# Altium PCB Node1.PcbDoc
Units mil, origin at the board's own origin, x right, y up, seen from the top; angles counter-clockwise.
Board outline 4850 x 3500 mil, 2 copper layers (Top Layer, Bottom Layer); 46 components, 70 nets, 310 pads, 88 vias.
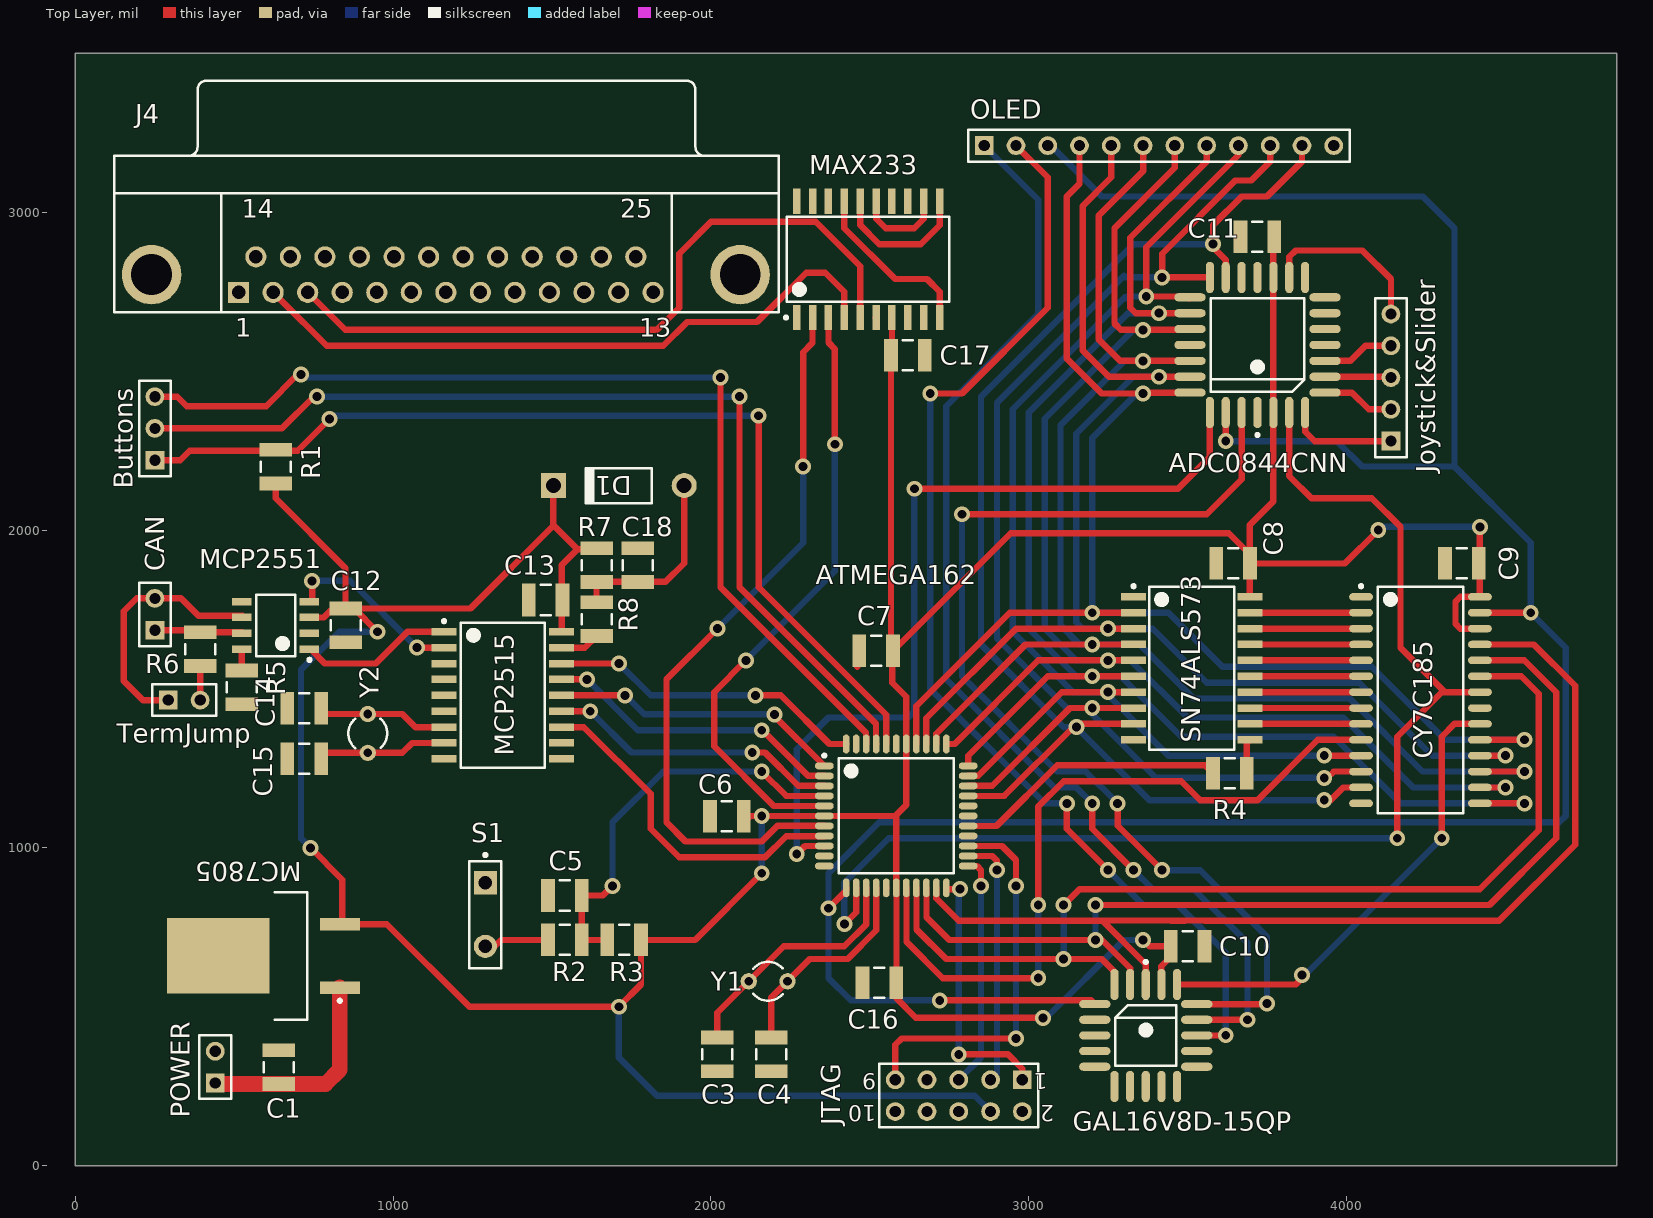
[diagram p0: Top Layer view]
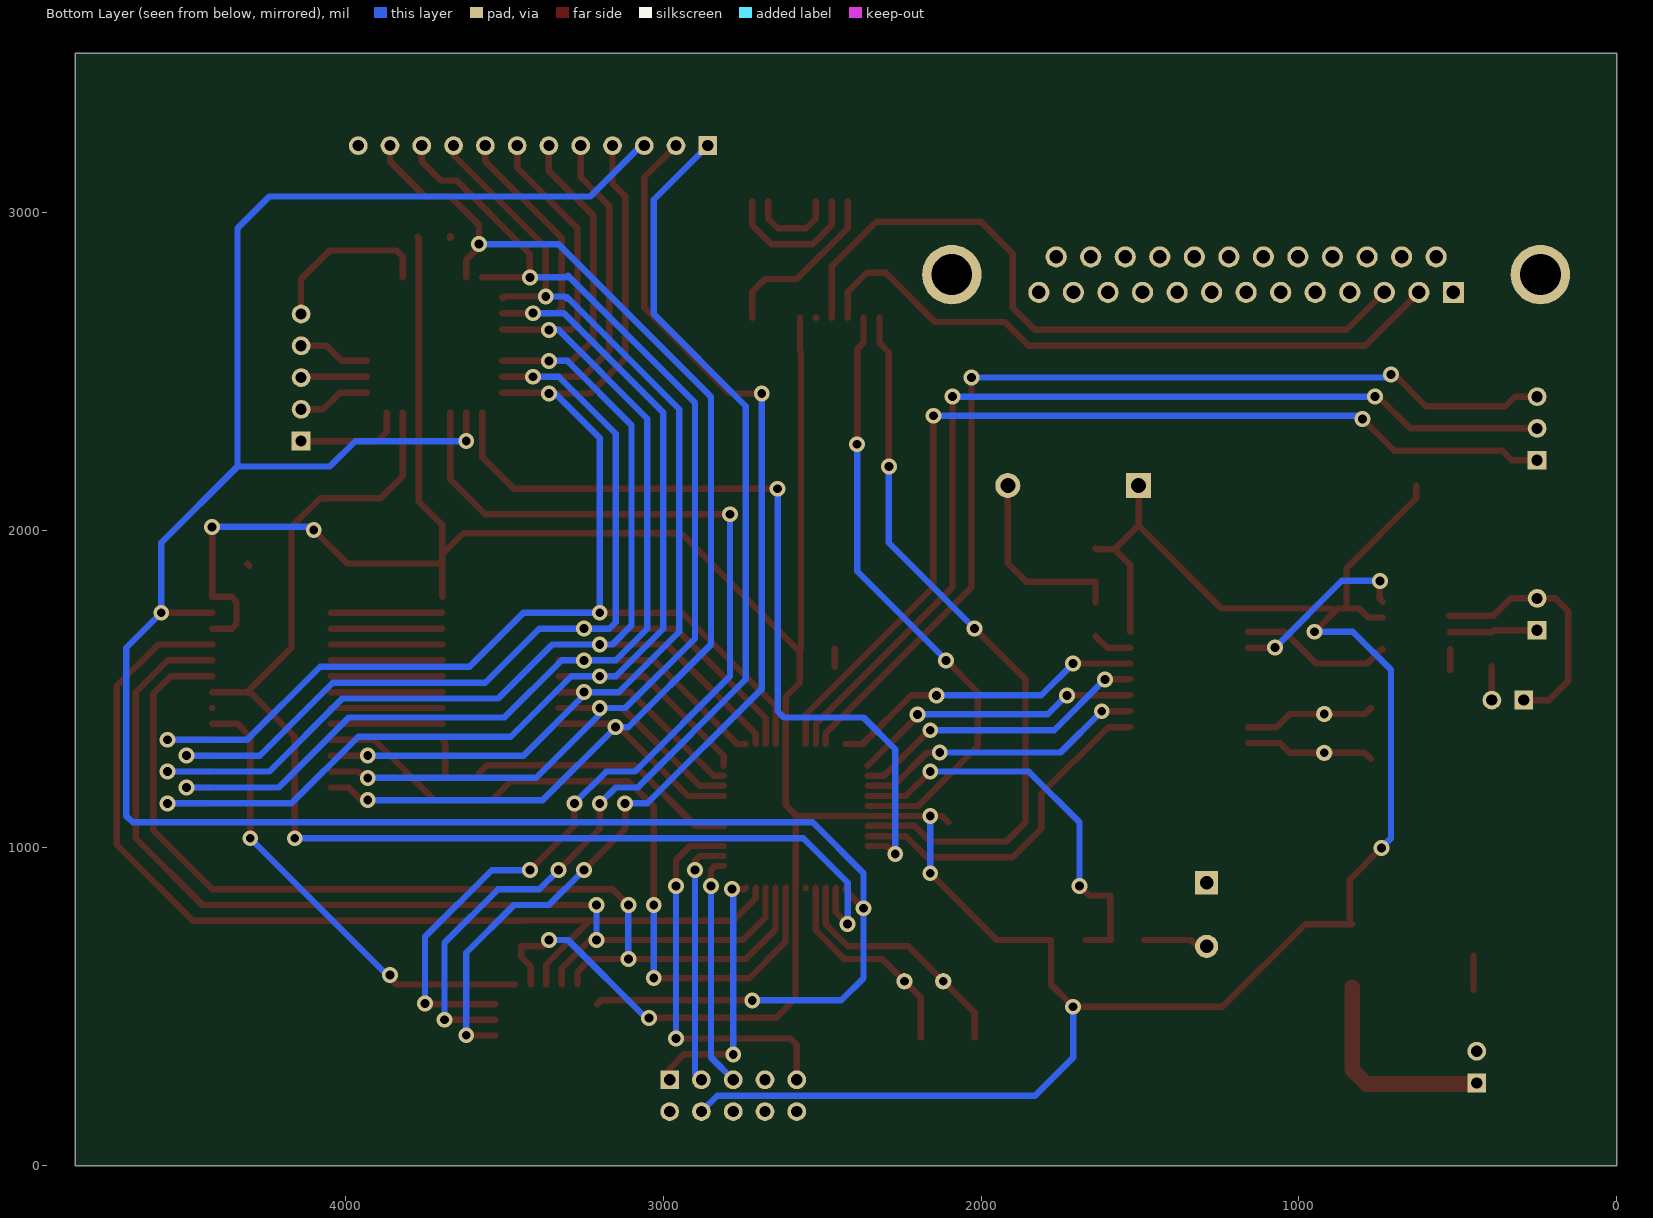
[diagram p1: Bottom Layer view, seen from below]

## Layer stack, top to bottom
Top Solder: solder mask 0.4, Solder Resist, Dk 3.5
Top Layer: signal copper 1.4
Dielectric 1: dielectric 12.6, FR-4, Dk 4.8
Bottom Layer: signal copper 1.4
Bottom Solder: solder mask 0.4, Solder Resist, Dk 3.5

## Board outline
0,0 2410,0 4850,0 4850,1750 4850,3500 4560,3500 3040,3500 0,3500

## Design rules (kind name [scope] priority, off if disabled: settings)
Clearance [All] p1: gap=10 except(8: SMDPad-SMDPad)
PolygonConnect [All] p1: connectstyle=Relief reliefconductorwidth=10 reliefentries=4 polygonreliefangle="90 Angle" airgapwidth=10
RoomDefinition U_ADC [InComponentClass('U_ADC')] p1: confinementstyle=ConfineIn formatcopy=TRUE lockcomponents=FALSE outline 3420,2165.2 4300,2165.2 4300,3020.2 3420,3020.2
RoomDefinition U_USART [InComponentClass('U_USART')] p2: confinementstyle=ConfineIn formatcopy=TRUE lockcomponents=FALSE outline 100,2550 2450,2550 2450,2450 2800,2450 2800,3100 2220,3100 2220,3450 100,3450
RoomDefinition U_SRAM [InComponentClass('U_SRAM')] p3: confinementstyle=ConfineIn formatcopy=TRUE lockcomponents=FALSE outline 3240,1050 4540,1050 4540,2050 3240,2050
RoomDefinition U_OLED [InComponentClass('U_OLED')] p4: confinementstyle=ConfineIn formatcopy=TRUE lockcomponents=FALSE outline 2790,3285 2790,3135 4040,3135 4040,3285
RoomDefinition U_GAL [InComponentClass('U_GAL')] p5: confinementstyle=ConfineIn formatcopy=TRUE lockcomponents=FALSE outline 3118.86,101.14 3918.86,101.14 3918.86,851.14 3118.86,851.14
RoomDefinition U_CAN [InComponentClass('U_CAN')] p6: confinementstyle=ConfineIn formatcopy=TRUE lockcomponents=FALSE outline 100,2050 1400,2050 1400,2200 1970,2200 1970,1630 1650,1630 1650,1150 100,1150
RoomDefinition MCU&VoltageRegulator [InComponentClass('MCU&VoltageRegulator')] p7: confinementstyle=ConfineIn formatcopy=TRUE lockcomponents=FALSE outline 100,2500 100,2100 1350,2100 1350,2250 2000,2250 2000,1600 1700,1600 1700,1100 100,1100 100,100 3070,100 3070,1690 3060,1700 2400,1700 2400,2500
RoutingVias [All] p1: holewidth=28 width=50 viastyle="Through Hole" minholewidth=28 minwidth=50 maxholewidth=28 maxwidth=50
SolderMaskExpansion [All] p1: expansion=4
Width [All] p1: maxlimit=50 minlimit=10 preferedwidth=10
30 further rules are at their usual default settings.

## Classes and differential pairs
component class MCU&VoltageRegulator: ATMEGA162 Buttons C1 C3 C4 C5 C6 C7 C16 MC7805 POWER R1 R2 R3 S1 Y1
component class U_ADC: ADC0844CNN C11 Joystick&Slider
component class U_CAN: C12 C13 C14 C15 C18 CAN D1 MCP2515 MCP2551 R5 R6 R7 R8 TermJump Y2
component class U_GAL: C10 GAL16V8D-15QP
component class U_OLED: OLED
component class U_SRAM: C8 C9 CY7C185 R4 SN74ALS573
component class U_USART: C17 J4 MAX233
net class A[8..11]: A8 A9 A10 A11
net class AD[0..7]: AD0 AD1 AD2 AD3 AD4 AD5 AD6 AD7

## Components (designator, comment, footprint, x,y, rotation, side; value= is the part's Value field where it differs from the comment)
ADC0844CNN "ADC0844CNN" "ADC0844CNN PLCC 28-PIN" 3720,2582.6 r180 top
ATMEGA162 "ATMEGA162" "ATmega162 TQFP 44-pin" 3035.91,647.6 r0 top
Buttons "Button header" HDR1X3 250,2220 r90 top
C1 "Cap" C1210 640,310 r270 top
C3 "Cap" C1210 2020,350 r270 top
C4 "Cap" C1210 2190,350 r90 top
C5 "Cap" C1210 1540,850 r0 top
C6 "Cap" C1210 2050,1100 r180 top
C7 "Cap" C1210 2520,1620 r180 top
C8 "Cap" C1210 3643.07,1895 r180 top
C9 "Cap" C1210 4363.07,1895 r180 top
C10 "Cap" C1210 3500,690 r180 top
C11 "Cap" C1210 3720,2922.6 r180 top
C12 "Cap" C1210 850,1700 r270 top
C13 "Cap" C1210 1480,1780 r0 top
C14 "Cap" C1210 720,1440 r180 top
C15 "Cap" C1210 720,1280 r180 top
C16 "Cap" C1210 2530,575 r180 top
C17 "Cap" C1210 2620,2550 r0 top
C18 "Cap" C1210 1770,1890 r90 top
CAN "CAN Header" HDR1X2 250,1685 r90 top
CY7C185 "SRAM" "CY7C185 SOIC 28-PIN" 4232.99,1465 r0 top
D1 "Diode 1N4002" DO-41 1710,2140 r180 top
GAL16V8D-15QP "GAL16V8D-15QP" "GAL 16V8D-10LJ/-10QL PLCC 20-PIN" 3368.43,409.57 r0 top
J4 "D Connector 25" DSUB1.385-2H25A 1165.65,3178.11 r0 top
Joystick&Slider "Input1 header" HDR1X5 4140,2280 r90 top
JTAG "JTAG" HDR2X5 2980,270 r180 top
MAX233 "USART transceiver" "MAX233 SOIC 20-PIN" 2494.74,2851.81 r90 top
MC7805 "Voltage regulator" "MC7805 DPAK 3-PIN" 591.73,660 r180 top
MCP2515 "CAN controller" "MCP2515 SOIC 18-PIN" 1344.96,1480 r0 top
MCP2551 "CAN transceiver" "MACP2551 SOIC 8-PIN" 630,1700 r180 top
OLED "OLED Header" HDR1X12 2860,3210 r0 top
POWER "Power header" HDR1X2 440,260 r90 top
R1 "Res" 14-1210 630,2200 r90 top
R2 "Res" 14-1210 1540,710 r0 top
R3 "Res" 14-1210 1726.85,710 r0 top
R4 "Res1" 14-1210 3633.07,1235 r180 top
R5 "Res" 14-1210 523.7,1505 r90 top
R6 "Res" 14-1210 392.32,1625 r90 top
R7 "Res" 14-1210 1640,1890 r270 top
R8 "Res" 14-1210 1640,1720 r270 top
S1 "SW-PB" SPST-2 1290,790 r270 top
SN74ALS573 "D-latch" "D-Latch SOIC 20-PIN" 3513.07,1565 r0 top
TermJump "Jumper header" HDR1X2 292.32,1465 r0 top
Y1 "XTAL" R38 2180,580 r270 top
Y2 "XTAL" R38 920,1360 r180 top

## Footprints (in the part's own frame and the unit in brackets; to place one, negate y for a bottom-side part, rotate by r counter-clockwise, add the part's x,y. Pads: shape width x height; smd on the part's side, far side on the other; paste and mask are expansions set on the pad)
14-1210 [mm] "Chip Resistor, Body 3.2x2.5mm, IPC High Density"
  rect 1.1x2.6 smd: 1(-1.35,0) 2(1.35,0)
  silkscreen extent -0.4,-1.2 0.4,1.2, body extent -1.68,-1.32 1.68,1.32, height 0.9
"ADC0844CNN PLCC 28-PIN" [mm] "Leaded Chip Carrier, 28-Leads, Body 12,45x12,45mm, Pitch 1,270mm, IPC Medium Density"
  oval 0.65x2.5 smd: 1(0,5.4) 2(-1.27,5.4) 3(-2.54,5.4) 4(-3.81,5.4) 12(-3.81,-5.4) 13(-2.54,-5.4) 14(-1.27,-5.4) 15(0,-5.4) 16(1.27,-5.4) 17(2.54,-5.4) 18(3.81,-5.4) 26(3.81,5.4) 27(2.54,5.4) 28(1.27,5.4)
  oval 2.5x0.65 smd: 5(-5.4,3.81) 6(-5.4,2.54) 7(-5.4,1.27) 8(-5.4,0) 9(-5.4,-1.27) 10(-5.4,-2.54) 11(-5.4,-3.81) 19(5.4,-3.81) 20(5.4,-2.54) 21(5.4,-1.27) 22(5.4,0) 23(5.4,1.27) 24(5.4,2.54) 25(5.4,3.81)
  silkscreen extent -3.75,-3.75 3.75,7.32, body extent -5.79,-5.79 5.79,5.79, height 4.57
"ATmega162 TQFP 44-pin" [mm] "TQFP, 44-Leads, Body 10,00x10,00mm, Pitch 0,80mm, IPC Medium Density"
  oval 1.5x0.55 smd: 1(-17.25,15.5) 2(-17.25,14.7) 3(-17.25,13.9) 4(-17.25,13.1) 5(-17.25,12.3) 6(-17.25,11.5) 7(-17.25,10.7) 8(-17.25,9.9) 9(-17.25,9.1) 10(-17.25,8.3) 11(-17.25,7.5) 23(-5.75,7.5) 24(-5.75,8.3) 25(-5.75,9.1) 26(-5.75,9.9) 27(-5.75,10.7) 28(-5.75,11.5) 29(-5.75,12.3) 30(-5.75,13.1) 31(-5.75,13.9) 32(-5.75,14.7) 33(-5.75,15.5)
  oval 0.55x1.5 smd: 12(-15.5,5.75) 13(-14.7,5.75) 14(-13.9,5.75) 15(-13.1,5.75) 16(-12.3,5.75) 17(-11.5,5.75) 18(-10.7,5.75) 19(-9.9,5.75) 20(-9.1,5.75) 21(-8.3,5.75) 22(-7.5,5.75) 34(-7.5,17.25) 35(-8.3,17.25) 36(-9.1,17.25) 37(-9.9,17.25) 38(-10.7,17.25) 39(-11.5,17.25) 40(-12.3,17.25) 41(-13.1,17.25) 42(-13.9,17.25) 43(-14.7,17.25) 44(-15.5,17.25)
  silkscreen extent -17.37,6.9 -6.9,16.45, body extent -16.5,6.5 -6.5,16.5, height 1.2
C1210 [mm] "Chip Capacitor, Body 3.2x2.5mm, IPC High Density"
  rect 1.1x2.6 smd: 1(-1.35,0) 2(1.35,0)
  silkscreen extent -0.4,-1.2 0.4,1.2, body extent -1.7,-1.35 1.7,1.35, height 1.3
"CY7C185 SOIC 28-PIN" [mm] "SOIC, 28-Leads, Body 17,90x7,50mm, Pitch 1,27mm, IPC Medium Density"
  oval 1.9x0.6 smd: 1(-4.75,8.255) 2(-4.75,6.985) 3(-4.75,5.715) 4(-4.75,4.445) 5(-4.75,3.175) 6(-4.75,1.905) 7(-4.75,0.635) 8(-4.75,-0.635) 9(-4.75,-1.905) 10(-4.75,-3.175) 11(-4.75,-4.445) 12(-4.75,-5.715) 13(-4.75,-6.985) 14(-4.75,-8.255) 15(4.75,-8.255) 16(4.75,-6.985) 17(4.75,-5.715) 18(4.75,-4.445) 19(4.75,-3.175) 20(4.75,-1.905) 21(4.75,-0.635) 22(4.75,0.635) 23(4.75,1.905) 24(4.75,3.175) 25(4.75,4.445) 26(4.75,5.715) 27(4.75,6.985) 28(4.75,8.255)
  silkscreen extent -4.87,-9.05 3.4,9.23, body extent -3.8,-9.05 3.8,9.05, height 2.67
"D-Latch SOIC 20-PIN" [mm] "SOIC, 20-Leads, Body 12,80x7,50mm, Pitch 1,27mm, IPC Medium Density"
  rect 2x0.6 smd: 1(-4.65,5.715) 2(-4.65,4.445) 3(-4.65,3.175) 4(-4.65,1.905) 5(-4.65,0.635) 6(-4.65,-0.635) 7(-4.65,-1.905) 8(-4.65,-3.175) 9(-4.65,-4.445) 10(-4.65,-5.715) 11(4.65,-5.715) 12(4.65,-4.445) 13(4.65,-3.175) 14(4.65,-1.905) 15(4.65,-0.635) 16(4.65,0.635) 17(4.65,1.905) 18(4.65,3.175) 19(4.65,4.445) 20(4.65,5.715)
  silkscreen extent -4.77,-6.5 3.4,6.69, body extent -3.8,-6.5 3.8,6.5, height 2.65
DO-41 [mm] "Diode, Axial; Body 5.2 x 2.7 mm (LxDia. max), Lead Dia. 0.86 mm (max)"
  round 2 hole 1.2: 1(-5.23,0)
  rect 2x2 hole 1.2: 2(5.23,0)
  silkscreen extent -2.65,-1.4 2.75,1.4
DSUB1.385-2H25A [mm] "Connector; D Subminiature; 25 Position; Right Angle; Pitch 1.385 mm"
  rect 1.69x1.69 hole 1.09: 1(-16.566,-10.92)
  round 1.69 hole 1.09: 2(-13.805,-10.92) 3(-11.044,-10.92) 4(-8.283,-10.92) 5(-5.522,-10.92) 6(-2.761,-10.92) 7(0,-10.92) 8(2.761,-10.92) 9(5.522,-10.92) 10(8.283,-10.92) 11(11.044,-10.92) 12(13.805,-10.92) 13(16.566,-10.92) 14(-15.185,-8.08) 15(-12.424,-8.08) 16(-9.663,-8.08) 17(-6.902,-8.08) 18(-4.141,-8.08) 19(-1.38,-8.08) 20(1.381,-8.08) 21(4.142,-8.08) 22(6.903,-8.08) 23(9.664,-8.08) 24(12.425,-8.08) 25(15.186,-8.08)
  round 4.76 hole 3.26: 26(-23.526,-9.5) 27(23.526,-9.5)
  silkscreen extent -26.5,-12.5 26.6,6
"GAL 16V8D-10LJ/-10QL PLCC 20-PIN" [mm] "Leaded Chip Carrier, 20-Leads, Body 9,79x9,79mm, Pitch 1,250mm, IPC Medium Density"
  oval 0.65x2.5 smd: 1(0,4.075) 2(-1.25,4.075) 3(-2.5,4.075) 9(-2.5,-4.075) 10(-1.25,-4.075) 11(0,-4.075) 12(1.25,-4.075) 13(2.5,-4.075) 19(2.5,4.075) 20(1.25,4.075)
  oval 2.5x0.65 smd: 4(-4.075,2.5) 5(-4.075,1.25) 6(-4.075,0) 7(-4.075,-1.25) 8(-4.075,-2.5) 14(4.075,-2.5) 15(4.075,-1.25) 16(4.075,0) 17(4.075,1.25) 18(4.075,2.5)
  silkscreen extent -2.43,-2.42 2.42,6, body extent -4.47,-4.47 4.47,4.47, height 4.52
HDR1X2 [mm] "Connector; Header; 2 Position"
  rect 1.5x1.5 hole 0.9: 1(0,0)
  round 1.5 hole 0.9: 2(2.54,0)
  silkscreen extent -1.27,-1.27 3.81,1.27
HDR1X3 [mm] "Connector; Header; 3 Position"
  rect 1.5x1.5 hole 0.9: 1(0,0)
  round 1.5 hole 0.9: 2(2.54,0) 3(5.08,0)
  silkscreen extent -1.27,-1.27 6.35,1.27
HDR1X5 [mm] "Connector; Header; 5 Position"
  rect 1.5x1.5 hole 0.9: 1(0,0)
  round 1.5 hole 0.9: 2(2.54,0) 3(5.08,0) 4(7.62,0) 5(10.16,0)
  silkscreen extent -1.27,-1.27 11.43,1.27
HDR1X12 [mm] "Connector; Header; 12 Position"
  rect 1.5x1.5 hole 0.9: 1(0,0)
  round 1.5 hole 0.9: 2(2.54,0) 3(5.08,0) 4(7.62,0) 5(10.16,0) 6(12.7,0) 7(15.24,0) 8(17.78,0) 9(20.32,0) 10(22.86,0) 11(25.4,0) 12(27.94,0)
  silkscreen extent -1.27,-1.27 29.21,1.27
HDR2X5 [mm] "Connector; Header; 5x2 Position"
  rect 1.5x1.5 hole 0.9: 1(0,0)
  round 1.5 hole 0.9: 2(0,2.54) 3(2.54,0) 4(2.54,2.54) 5(5.08,0) 6(5.08,2.54) 7(7.62,0) 8(7.62,2.54) 9(10.16,0) 10(10.16,2.54)
  silkscreen extent -1.27,-1.27 11.43,3.81
"MACP2551 SOIC 8-PIN" [mm] "SOIC, 8-Leads, Body 4,90x3,90mm, Pitch 1,27mm, IPC Medium Density"
  rect 1.55x0.6 smd: 1(-2.7,1.905) 2(-2.7,0.635) 3(-2.7,-0.635) 4(-2.7,-1.905) 5(2.7,-1.905) 6(2.7,-0.635) 7(2.7,0.635) 8(2.7,1.905)
  silkscreen extent -2.83,-2.45 1.55,2.88, body extent -1.95,-2.45 1.95,2.45, height 1.75
"MAX233 SOIC 20-PIN" [mm] "SOIC, 20-Leads, Body 12,80x7,50mm, Pitch 1,27mm, IPC Medium Density"
  rect 2x0.6 smd: 1(-4.65,5.715) 2(-4.65,4.445) 3(-4.65,3.175) 4(-4.65,1.905) 5(-4.65,0.635) 6(-4.65,-0.635) 7(-4.65,-1.905) 8(-4.65,-3.175) 9(-4.65,-4.445) 10(-4.65,-5.715) 11(4.65,-5.715) 12(4.65,-4.445) 13(4.65,-3.175) 14(4.65,-1.905) 15(4.65,-0.635) 16(4.65,0.635) 17(4.65,1.905) 18(4.65,3.175) 19(4.65,4.445) 20(4.65,5.715)
  silkscreen extent -4.77,-6.5 3.4,6.69, body extent -3.8,-6.5 3.8,6.5, height 2.65
"MC7805 DPAK 3-PIN" [mm] "D2-PAK, 3-Pads, Body 7,77x8,48mm (max), IPC Medium Density"
  rect 3.2x1 smd: 1(-6.1,2.54) 3(-6.1,-2.54)
  rect 8.2x6.05 smd: 2(3.6,0)
  silkscreen extent -6.23,-5.1 -0.9,5.1, body extent -3.5,-5.13 5.85,5.13, height 4.58
"MCP2515 SOIC 18-PIN" [mm] "SOIC, 18-Leads, Body 11,55x7,50mm, Pitch 1,27mm, IPC Medium Density"
  rect 2x0.6 smd: 1(-4.7,5.08) 2(-4.7,3.81) 3(-4.7,2.54) 4(-4.7,1.27) 5(-4.7,0) 6(-4.7,-1.27) 7(-4.7,-2.54) 8(-4.7,-3.81) 9(-4.7,-5.08) 10(4.7,-5.08) 11(4.7,-3.81) 12(4.7,-2.54) 13(4.7,-1.27) 14(4.7,0) 15(4.7,1.27) 16(4.7,2.54) 17(4.7,3.81) 18(4.7,5.08)
  silkscreen extent -4.82,-5.8 3.35,6.05, body extent -3.75,-5.8 3.75,5.8, height 2.65
R38 [mm] "Crystal, Thru-Hole; 2 Leads; Body 3.1 x 8.2 mm (Dia.xH)"
  round 1.3 hole 0.7: 1(0,1.55) 2(0,-1.55)
  silkscreen extent -1.55,-1.19 1.55,1.17
SPST-2 [mm] "Switch; 2 Leads"
  rect 1.85x1.85 hole 1.1: 1(-2.54,0)
  round 1.85 hole 1.1: 2(2.54,0)
  silkscreen extent -4.89,-1.27 4.28,1.27

## Part data
ADC0844CNN: "ADC - Analogue to Digital Converter"
ATMEGA162: "Atmega162 MicroControllerUnit"
Buttons: library part "Header 3", "Header, 3-Pin"
C1 C3 C4 C5 C6 C7 C8 C9 C10 C11 C12 C13 C14 C15 C16 C17 C18: library part "Cap Semi", "Capacitor (Semiconductor SIM Model)"
CAN POWER TermJump: library part "Header 2", "Header, 2-Pin"
CY7C185: library part CY7C185, "SRAM - Static Random Access Memory"
D1: "1 Amp General Purpose Rectifier"
GAL16V8D-15QP: "GAL - Generic Array Logic"
J4: "Receptacle Assembly, 25 Position, Right Angle"
Joystick&Slider: library part "Header 5", "Header, 5-Pin"
JTAG: library part "Header 5X2", "Header, 5-Pin, Dual row"
MAX233: library part MAX233, "Maxim RS232 transceiver"
MC7805: library part MC7805, "MC7805 Voltage Regulator"
MCP2515: library part MCP2515
MCP2551: library part MCP2551, "CAN Transceiver"
OLED: library part "Header 12", "Header, 12-Pin"
R1 R2 R3 R4 R5 R6 R7 R8: library part Res3, "Resistor"
S1: "Switch"
SN74ALS573: library part SN74ALS573, "D-Latch"
Y1 Y2: "Crystal Oscillator"

## Via types
v1: diameter 50, hole 28, Top Layer to Bottom Layer, 88 vias

## Nets (pads, with @x,y where several pads share a name; then routed paths per layer and width w, separated by ;. In a path a pad name is that pad's centre, name@x,y a point inside that pad or via, vN(x,y) a via of type N, cw(c..) or ccw(c..) an arc to the next point about the centre after c; other vN are vias at no path point)
A8: ATMEGA162.18 CY7C185.10 | length 2324.5
  Top Layer w20: ATMEGA162.18 2615.32,873.31 2615.32,704.68 2730,590 v1(3030,590) ; v1(3030,820) 3030,1130 3110,1210 3480,1210 3540,1150 3720,1150 3910,1340 CY7C185.10 CY7C185.10@4046.06,1340
  Bottom Layer w20: v1(3030,590) v1(3030,820)
A9: ATMEGA162.19 CY7C185.23 GAL16V8D-15QP.3 | length 3249.5
  Top Layer w20: ATMEGA162.19 2646.81,873.31 2646.81,743.19 2740,650 v1(3110,650) 3230,650 3270,610 GAL16V8D-15QP.3 ; v1(3110,820) 3160,870 4420,870 4605,1055 4605,1485 4550,1540 CY7C185.23@4420.08,1540
  Bottom Layer w20: v1(3110,650) v1(3110,820)
A10: ATMEGA162.20 CY7C185.24 GAL16V8D-15QP.2 | length 3247.5
  Top Layer w20: ATMEGA162.20 2678.31,873.31 2678.31,781.69 2750,710 v1(3210,710) 3220,720 3319.21,620.79 GAL16V8D-15QP.2 ; v1(3210,820) 4450,820 4660,1030 4660,1490 4560,1590 CY7C185.24@4420.08,1590
  Bottom Layer w20: v1(3210,710) v1(3210,820)
A11: ATMEGA162.21 CY7C185.25 GAL16V8D-15QP.1 | length 3284.8
  Top Layer w20: ATMEGA162.21 2709.13,840.87 2780,770 3230,770 ; GAL16V8D-15QP.1 3368.43,633.94 3231.18,771.18 3446.79,771.18 3447.97,770 3492.03,770 3493.21,771.18 3553.09,771.18 3554.27,770 4480,770 4720,1010 4720,1510 4590,1640 CY7C185.25@4420.08,1640
AD0: ADC0844CNN.25 ATMEGA162.37 CY7C185.19 OLED.4 SN74ALS573.2 | length 4479.3
  Top Layer w20: ATMEGA162.37 2646.14,1446.14 2940,1740 v1(3200,1740) SN74ALS573.2 ; OLED.4 3160,3090 3120,3050 3120,2540 3230,2430 v1(3360,2430) 3362.6,2432.6 ADC0844CNN.25 ; CY7C185.19 v1(4560,1340)
  Bottom Layer w20: v1(3360,2430) 3340,2430 3200,2290 v1(3200,1740) 3440,1740 3610,1570 4080,1570 4310,1340 v1(4560,1340)
AD1: ADC0844CNN.24 ATMEGA162.36 CY7C185.18 OLED.5 SN74ALS573.3 | length 4435.6
  Top Layer w20: ATMEGA162.36 2677.64,1407.64 2960,1690 v1(3250,1690) SN74ALS573.3 ; OLED.5 3260,3110 3170,3020 3170,2565.2 3252.6,2482.6 v1(3410,2482.6) ADC0844CNN.24 ; CY7C185.18@4420.08,1290 v1(4500,1290)
  Bottom Layer w20: v1(3410,2482.6) 3328.96,2482.6 3150,2303.64 3150,1710 3170,1690 v1(3250,1690) 3390,1690 3560,1520 4040,1520 4270,1290 v1(4500,1290)
AD2: ADC0844CNN.23 ATMEGA162.35 CY7C185.17 OLED.6 SN74ALS573.4 | length 4517.4
  Top Layer w20: ATMEGA162.35 2709.13,1359.13 2990,1640 v1(3200,1640) SN74ALS573.4 ; OLED.6 3360,3130 3220,2990 3220,2600 3287.4,2532.6 v1(3360,2532.6) ADC0844CNN.23 ; CY7C185.17 v1(4560,1240)
  Bottom Layer w20: v1(3360,2532.6) 3302.6,2532.6 3100,2330 3100,1700 3160,1640 v1(3200,1640) 3350,1640 3520,1470 4010,1470 4240,1240 v1(4560,1240)
AD3: ADC0844CNN.21 ATMEGA162.34 CY7C185.16 OLED.7 SN74ALS573.5 | length 4406.9
  Top Layer w20: ATMEGA162.34 2766.73,1326.73 3030,1590 v1(3250,1590) SN74ALS573.5 ; OLED.7 3460,3140 3270,2950 3270,2650 3290,2630 v1(3360,2630) 3504.8,2630 ADC0844CNN.21 ; CY7C185.16@4420.08,1190 v1(4500,1190)
  Bottom Layer w20: v1(3360,2630) 3330,2630 3050,2350 3050,1690 3150,1590 v1(3250,1590) 3320,1590 3500,1410 3990,1410 4210,1190 v1(4500,1190)
AD4: ADC0844CNN.20 ATMEGA162.33 CY7C185.15 OLED.8 SN74ALS573.6 | length 4607.3
  Top Layer w20: ATMEGA162.33 2809.53,1289.53 3060,1540 v1(3200,1540) SN74ALS573.6 ; ADC0844CNN.20 v1(3410,2682.6) 3337.4,2682.6 3320,2700 3320,2920 3560,3160 OLED.8 ; CY7C185.15@4420,1139.92 4420.08,1140 v1(4560,1140)
  Bottom Layer w20: v1(3410,2682.6) 3312.6,2682.6 3000,2370 3000,1690 3150,1540 v1(3200,1540) 3290,1540 3480,1350 3960,1350 4170,1140 v1(4560,1140)
AD5: ADC0844CNN.19 ATMEGA162.32 CY7C185.11 OLED.9 SN74ALS573.7 | length 3898
  Top Layer w20: ATMEGA162.32 2810.2,1227.01 2841,1227.01 3103.99,1490 v1(3250,1490) SN74ALS573.7 ; ADC0844CNN.19 3504.8,2730 3499.61,2735.2 v1(3370,2735.2) 3370,2889.96 3660,3179.96 OLED.9 ; v1(3930,1290) CY7C185.11 CY7C185.11@4046.06,1290
  Bottom Layer w20: v1(3370,2735.2) 3310.39,2735.2 3305.2,2730 3302.6,2732.6 2950,2380 2950,1680 3140,1490 v1(3250,1490) 3250,1480 3440,1290 v1(3930,1290)
AD6: ADC0844CNN.18 ATMEGA162.31 CY7C185.12 OLED.10 SN74ALS573.8 | length 4132.9
  Top Layer w20: ATMEGA162.31 2884.84,1194.84 3130,1440 v1(3200,1440) SN74ALS573.8 ; ADC0844CNN.18 v1(3420,2795.2) 3420,2870 3650,3100 3700,3100 3760,3160 OLED.10 ; v1(3930,1220) 3940,1220 3960,1240 CY7C185.12
  Bottom Layer w20: v1(3420,2795.2) 3304.8,2795.2 3300,2800 2900,2400 2900,1660 3120,1440 v1(3200,1440) 3200,1420 3400,1220 v1(3930,1220)
AD7: ADC0844CNN.17 ATMEGA162.30 CY7C185.13 OLED.11 SN74ALS573.9 | length 4338.8
  Top Layer w20: ATMEGA162.30 2923.35,1163.35 3140,1380 v1(3150,1380) 3150,1390 SN74ALS573.9 ; ADC0844CNN.17 3620,2850 3580,2890 v1(3580,2900) 3580,2960 3670,3050 3750,3050 3860,3160 OLED.11 ; v1(3930,1150) 3950,1150 3990,1190 CY7C185.13 CY7C185.13@4046.06,1190
  Bottom Layer w20: v1(3580,2900) 3330,2900 2850,2420 2850,1640 3110,1380 v1(3150,1380) 3380,1150 v1(3930,1150)
GND: ADC0844CNN.16 ATMEGA162.16 ATMEGA162.28 ATMEGA162.39 C1.1 C3.2 C4.1 C5.1 C6.2 C7.2 C8.2 C9.2 C10.1 C11.2 C12.2 C13.1 C14.2 C15.2 C16.2 C17.2 C18.2 CY7C185.14 CY7C185.21 GAL16V8D-15QP.10 J4.7 J4.26 J4.27 JTAG.2 JTAG.10 MAX233.6 MAX233.9 MC7805.2 MCP2515.9 MCP2551.2 OLED.12 POWER.2 R5.1 S1.1 SN74ALS573.1 SN74ALS573.10 | length 184.6
  Top Layer w20: MC7805.2@450,553.15 MC7805.2 ; C7.2@2460,1570 C7.2@2460,1626.85 ; MAX233.6@2518.82,2667.82 MAX233.6 ; ATMEGA162.16 ATMEGA162.16@2552.32,873.31 ; C11.2@3670,2919.45 C11.2 C11.2@3670,2925.75 ; C9.2@4303.07,1888.15 C9.2 ; CY7C185.21 CY7C185.21@4420.08,1440
MCU_RESET: ATMEGA162.4 C5.2 R2.2 R3.1 | length 1310.9
  Top Layer w20: R2.2@1590,710 R3.1@1670,710 ; R2.2 C5.2 ; C5.2@1610,850 C5.2 ; v1(1690,880) 1660,850 C5.2 ; v1(2160,1240) 2236.65,1163.35 ATMEGA162.4
  Bottom Layer w20: v1(1690,880) 1690,1080 1850,1240 v1(2160,1240)
NetADC0844CNN_3: ADC0844CNN.3 ATMEGA162.13 CY7C185.22 | length 3889.6
  Top Layer w20: v1(2420,760) 2457.17,797.17 ATMEGA162.13 ; ADC0844CNN.3 3820,2170 3890,2100 4080,2100 4170,2010 4170,1630 4310,1490 ; v1(4160,1030) 4160,1350 4300,1490 4310,1490 ; CY7C185.22 4310,1490
  Bottom Layer w20: v1(2420,760) 2420,890 2560,1030 v1(4160,1030)
NetADC0844CNN_4: ADC0844CNN.4 Joystick&Slider.1 | length 332.4
  Top Layer w20: ADC0844CNN.4 3870,2310 3900,2280 Joystick&Slider.1@4130,2280
NetADC0844CNN_5: ADC0844CNN.5 Joystick&Slider.2 | length 219.2
  Top Layer w20: ADC0844CNN.5 4017.4,2432.6 4070,2380 Joystick&Slider.2@4130,2380
NetADC0844CNN_6: ADC0844CNN.6 Joystick&Slider.3 | length 200
  Top Layer w20: ADC0844CNN.6 Joystick&Slider.3@4132.6,2482.6
NetADC0844CNN_7: ADC0844CNN.7 Joystick&Slider.4 | length 217
  Top Layer w20: ADC0844CNN.7 4012.6,2532.6 4060,2580 Joystick&Slider.4@4130,2580
NetADC0844CNN_13: ADC0844CNN.13 Joystick&Slider.5 | length 540.4
  Top Layer w20: ADC0844CNN.13 3820,2860 3840,2880 4050,2880 4140,2790 Joystick&Slider.5
NetADC0844CNN_26: ADC0844CNN.26 ATMEGA162.9 | length 2659.6
  Top Layer w20: v1(2270,980) 2295.87,1005.87 ATMEGA162.9 ATMEGA162.9@2356.1,1005.2 ; v1(2640,2130) 3470,2130 3570,2230 ADC0844CNN.26
  Bottom Layer w20: v1(2270,980) 2270,1310 2370,1410 2620,1410 2640,1430 v1(2640,2130)
NetADC0844CNN_27: ADC0844CNN.27 ATMEGA162.12 CY7C185.27 GAL16V8D-15QP.4 OLED.3 | length 8083.5
  Top Layer w20: v1(2370,810) 2425.67,865.67 ATMEGA162.12 ; v1(2720,520) 3195.98,520 GAL16V8D-15QP.4 ; v1(3620,2280) ADC0844CNN.27 ; CY7C185.27 v1(4580,1740)
  Bottom Layer w20: v1(2720,520) 2440,520 2370,590 v1(2370,810) 2370,920 2530,1080 4670,1080 4690,1100 4690,1630 v1(4580,1740) 4580,1960 4340,2200 ; OLED.3 3060,3220 3230,3050 4240,3050 4340,2950 4340,2200 ; v1(3620,2280) 3970,2280 4050,2200 4340,2200
NetADC0844CNN_28: ADC0844CNN.28 GAL16V8D-15QP.18 | length 3418.2
  Top Layer w20: v1(2790,2050) 3560,2050 3670,2160 ADC0844CNN.28 ; v1(3280,1140) 3280,1070 v1(3420,930) ; GAL16V8D-15QP.18 3747.99,507.99 v1(3750,510)
  Bottom Layer w20: v1(2790,2050) 2790,1540 3090,1240 3180,1240 v1(3280,1140) ; v1(3420,930) 3540,930 3750,720 v1(3750,510)
NetATMEGA162_1: ATMEGA162.1 MCP2515.14 | length 922
  Top Layer w20: MCP2515.14 v1(1730,1480) ; v1(2200,1420) 2200,1414.61 ATMEGA162.1
  Bottom Layer w20: v1(1730,1480) 1790,1420 v1(2200,1420)
NetATMEGA162_2: ATMEGA162.2 MCP2515.15 | length 952.6
  Top Layer w20: MCP2515.15 v1(1610,1530) ; v1(2160,1370) 2162.31,1370 2305.3,1227.01 2356.1,1227.01 ATMEGA162.2
  Bottom Layer w20: v1(1610,1530) 1770,1370 v1(2160,1370)
NetATMEGA162_3: ATMEGA162.3 MCP2515.13 | length 924.2
  Top Layer w20: MCP2515.13 v1(1620,1430) ; v1(2130,1300) 2170,1300 2275.16,1194.84 ATMEGA162.3
  Bottom Layer w20: v1(1620,1430) 1750,1300 v1(2130,1300)
NetATMEGA162_5: ATMEGA162.5 MAX233.3 | length 1939.2
  Top Layer w20: v1(2110,1590) 2010,1490 2010,1320 2198.15,1131.85 ATMEGA162.5 ; MAX233.3 2369.74,2590.26 2390,2570 v1(2390,2270)
  Bottom Layer w20: v1(2110,1590) 2390,1870 v1(2390,2270)
NetATMEGA162_7: ATMEGA162.7 MAX233.2 | length 2321.6
  Top Layer w20: v1(2020,1690) 1860,1530 1860,1080 1920,1020 2160,1020 2209.53,1069.53 2356.1,1069.53 ATMEGA162.7 ; v1(2290,2200) 2290,2560 2319.74,2589.74 MAX233.2
  Bottom Layer w20: v1(2020,1690) 2290,1960 v1(2290,2200)
NetATMEGA162_8: ATMEGA162.8 MCP2515.12 | length 1088.9
  Top Layer w20: MCP2515.12 1600,1380 1810,1170 1810,1060 1900,970 2170,970 2236.69,1036.69 2356.1,1036.69 ATMEGA162.8
NetATMEGA162_14: ATMEGA162.14 C3.1 Y1.2 | length 776.9
  Top Layer w20: C3.1 2020,481.02 Y1.2 2228.98,690 2420,690 2488.66,758.66 ATMEGA162.14
NetATMEGA162_15: ATMEGA162.15 C4.2 Y1.1 | length 677.3
  Top Layer w20: C4.2 2190,453.15 2190,528.98 Y1.1 2311.02,650 2430,650 2520.16,740.16 ATMEGA162.15
NetATMEGA162_22: ATMEGA162.22 JTAG.1 | length 805.3
  Top Layer w20: ATMEGA162.22 2744.61,870 v1(2783.98,870) ; v1(2780,350) 2935,350 2980,305 JTAG.1@2980,285
  Bottom Layer w20: v1(2780,350) 2780,866.02 v1(2783.98,870)
NetATMEGA162_23: ATMEGA162.23 JTAG.5 | length 734.8
  Top Layer w20: ATMEGA162.23 2837.13,942.87 2850,930 v1(2850,880)
  Bottom Layer w20: JTAG.5 2850,340 v1(2850,880)
NetATMEGA162_24: ATMEGA162.24 JTAG.3 | length 808.9
  Top Layer w20: ATMEGA162.24 2885.63,974.37 2900,960 v1(2900,930)
  Bottom Layer w20: JTAG.3@2870,260 JTAG.3 2900,290 v1(2900,930)
NetATMEGA162_25: ATMEGA162.25 JTAG.9 | length 1213.8
  Top Layer w20: JTAG.9@2580,285 2580,380 2600,400 v1(2960,400) ; ATMEGA162.25 2915.87,1005.87 2960,961.73 v1(2960,880)
  Bottom Layer w20: v1(2960,400) v1(2960,880)
NetATMEGA162_27: ATMEGA162.27 R4.2 | length 859.9
  Top Layer w20: ATMEGA162.27 2898.86,1068.86 3090,1260 3554.92,1260 R4.2
NetATMEGA162_40: ATMEGA162.40 Buttons.1 R1.2 | length 3147.6
  Top Layer w20: Buttons.1@260,2220 330,2220 360,2250 700,2250 v1(800,2350) ; v1(2150,2360) 2150,1820 2551.65,1418.35 ATMEGA162.40
  Bottom Layer w20: v1(800,2350) 810,2360 v1(2150,2360)
NetATMEGA162_41: ATMEGA162.41 Buttons.2 | length 3142.9
  Top Layer w20: Buttons.2@260,2320 650,2320 750,2420 v1(760,2420) ; v1(2090,2420) 2090,1820 2519.49,1390.51 2519.49,1327.4 ATMEGA162.41
  Bottom Layer w20: v1(760,2420) v1(2090,2420)
NetATMEGA162_42: ATMEGA162.42 Buttons.3 | length 3185.4
  Top Layer w20: Buttons.3@260,2420 320,2420 350,2390 600,2390 700,2490 700,2500 v1(710,2490) ; v1(2030,2480) 2030,1820 2487.99,1362.01 2487.99,1352.01 2488.66,1351.34 ATMEGA162.42
  Bottom Layer w20: v1(710,2490) 720,2480 v1(2030,2480)
NetATMEGA162_44: ATMEGA162.44 MCP2515.16 | length 1000.6
  Top Layer w20: MCP2515.16 v1(1710,1580) ; v1(2140,1480) 2220,1480 2373.27,1326.73 ATMEGA162.44
  Bottom Layer w20: v1(1710,1580) 1810,1480 v1(2140,1480)
NetC14_1: C14.1 MCP2515.7 Y2.2 | length 411.6
  Top Layer w20: C14.1 792.13,1421.02 Y2.2 1028.98,1421.02 1070,1380 MCP2515.7
NetC15_1: C15.1 MCP2515.8 Y2.1 | length 407.5
  Top Layer w20: C15.1 792.13,1298.98 Y2.1 1028.98,1298.98 1060,1330 MCP2515.8
NetC18_1: C18.1 D1.1 R7.2 R8.1 | length 608.2
  Top Layer w20: R8.1 R7.2 C18.1 1856.85,1836.85 1915.91,1895.91 D1.1
NetCAN_1: CAN.1 MCP2551.7 R6.2 | length 294.7
  Top Layer w20: CAN.1@232.32,1685 CAN.1 385.47,1685 R6.2 MCP2551.7@524.17,1678.15
NetCAN_2: CAN.2 MCP2551.6 TermJump.1 | length 797.9
  Top Layer w20: TermJump.1 212.32,1465 152.32,1525 152.32,1745 192.32,1785 CAN.2 332.32,1785 387.32,1730 MCP2551.6@526.02,1730
NetCY7C185_2: CY7C185.2 SN74ALS573.19 | length 349.9
  Top Layer w20: SN74ALS573.19 CY7C185.2 CY7C185.2@4046.06,1740
NetCY7C185_3: CY7C185.3 SN74ALS573.18 | length 349.9
  Top Layer w20: SN74ALS573.18 CY7C185.3 CY7C185.3@4046.06,1690
NetCY7C185_4: CY7C185.4 SN74ALS573.17 | length 349.9
  Top Layer w20: SN74ALS573.17 CY7C185.4 CY7C185.4@4046.06,1640
NetCY7C185_5: CY7C185.5 SN74ALS573.16 | length 349.9
  Top Layer w20: SN74ALS573.16 CY7C185.5 CY7C185.5@4046.06,1590
NetCY7C185_6: CY7C185.6 SN74ALS573.15 | length 349.9
  Top Layer w20: SN74ALS573.15 CY7C185.6 CY7C185.6@4046.06,1540
NetCY7C185_7: CY7C185.7 SN74ALS573.14 | length 349.9
  Top Layer w20: SN74ALS573.14 CY7C185.7 CY7C185.7@4046.06,1490
NetCY7C185_8: CY7C185.8 SN74ALS573.13 | length 349.9
  Top Layer w20: SN74ALS573.13 CY7C185.8 CY7C185.8@4046.06,1440
NetCY7C185_9: CY7C185.9 SN74ALS573.12 | length 349.9
  Top Layer w20: SN74ALS573.12 CY7C185.9 CY7C185.9@4046.06,1390
NetCY7C185_20: CY7C185.20 GAL16V8D-15QP.19 | length 1486.1
  Top Layer w20: GAL16V8D-15QP.19 3840,570 3860,590 v1(3860,600) ; v1(4300,1030) 4300,1350 4340,1390 CY7C185.20
  Bottom Layer w20: v1(3860,600) 3870,600 v1(4300,1030)
NetGAL16V8D-15QP_16: GAL16V8D-15QP.16 OLED.2 | length 3635.2
  Top Layer w20: v1(2690,2430) 2790,2430 3060,2700 3060,3110 OLED.2 ; v1(3120,1140) 3120,1060 v1(3250,930) ; GAL16V8D-15QP.16 3619.57,409.57 v1(3620,410)
  Bottom Layer w20: v1(2690,2430) 2690,1500 3050,1140 v1(3120,1140) ; v1(3250,930) 3360,820 3470,820 3620,670 v1(3620,410)
NetGAL16V8D-15QP_17: GAL16V8D-15QP.17 OLED.1 | length 3611.8
  Top Layer w20: v1(3200,1140) 3200,1060 v1(3330,930) ; GAL16V8D-15QP.17 v1(3688.78,458.78)
  Bottom Layer w20: OLED.1 3030,3040 3030,2680 2740,2390 2740,1530 3080,1190 3150,1190 v1(3200,1140) ; v1(3330,930) 3390,870 3520,870 3688.78,701.22 v1(3688.78,458.78)
NetJ4_2: J4.2 MAX233.4 | length 2069
  Top Layer w20: J4.2 646.98,2723.36 790.33,2580 1850,2580 1925,2655 2145,2655 2300.26,2810.26 2359.74,2810.26 2419.74,2750.26 MAX233.4
NetJ4_3: J4.3 MAX233.5 | length 2247.7
  Top Layer w20: J4.3 849.04,2630 1830,2630 1900,2700 1900,2870 2000,2970 2330,2970 2469.74,2830.26 MAX233.5
NetMAX233_10: MAX233.10 MAX233.17 | length 549
  Top Layer w20: MAX233.17 2419.74,2950.26 2580,2790 2680,2790 2719.74,2750.26 MAX233.10
NetMAX233_11: MAX233.11 MAX233.16 | length 449.5
  Top Layer w20: MAX233.16 2469.74,2960.26 2530,2900 2660,2900 2719.74,2959.74 MAX233.11
NetMAX233_12: MAX233.12 MAX233.15 | length 284.6
  Top Layer w20: MAX233.15 2519.74,2980.26 2550,2950 2640,2950 2669.74,2979.74 MAX233.12
NetMCP2515_1: MCP2515.1 MCP2551.1 | length 483.7
  Top Layer w20: MCP2551.1 739.96,1625 784.96,1580 944.96,1580 1044.96,1680 MCP2515.1
NetMCP2515_2: MCP2515.2 MCP2551.4 | length 570.5
  Top Layer w20: MCP2551.4 744.96,1783.66 v1(744.96,1840) ; v1(1074.96,1630) MCP2515.2
  Bottom Layer w20: v1(744.96,1840) 864.96,1840 v1(1074.96,1630)
NetMCP2515_17: MCP2515.17 R8.2 | length 125.3
  Top Layer w20: MCP2515.17 1603.15,1630 R8.2
NetMCP2551_8: MCP2551.8 R5.2 | length 66.9
  Top Layer w20: R5.2 MCP2551.8
NetR2_1: R2.1 S1.2 | length 175.1
  Top Layer w20: S1.2@1320,690 1340,710 R2.1
NetR4_1: R4.1 SN74ALS573.11 | length 109.1
  Top Layer w20: R4.1 3686.22,1330.08 SN74ALS573.11
NetR6_1: R6.1 TermJump.2 | length 106.9
  Top Layer w20: TermJump.2 R6.1
VCC: ADC0844CNN.2 ADC0844CNN.14 ATMEGA162.6 ATMEGA162.17 ATMEGA162.38 C6.1 C7.1 C8.1 C9.1 C10.2 C11.1 C12.1 C13.2 C16.1 C17.1 CY7C185.26 CY7C185.28 D1.2 GAL16V8D-15QP.20 JTAG.4 MAX233.7 MC7805.3 MCP2515.18 MCP2551.3 R1.1 R3.2 R7.1 SN74ALS573.20 | length 13939.5
  Top Layer w20: R1.1@630,2140 630,2100 850,1880 C12.1 ; MCP2551.3 781.85,1725 810,1753.15 C12.1 ; v1(740,1000) 840,900 840,768.11 MC7805.3 980,760 1240,500 v1(1710,500) 1780,570 R3.2 1950,710 v1(2160,920) ; C12.1@896.85,1753.15 1243.15,1753.15 1504.09,2014.09 1504.09,2015.91 ; v1(950,1680) 876.85,1753.15 C12.1 ; D1.2 1504.09,2015.91 ; MCP2515.18 1530,1890 1580,1940 ; R7.1 1636.85,1940 1580,1940 ; C6.1@2103.15,1080 2123.15,1100 v1(2160,1100) 2160.35,1100.35 ATMEGA162.6 2583.15,1100.35 ; MAX233.7 2569.74,2562.89 2566.85,2560 C17.1 2566.85,1626.3 C7.1@2570,1623.15 ; v1(3045,465) 2645,465 2583.82,526.18 2583.82,873.31 ATMEGA162.17 2583.15,1100.35 ; v1(3360,710) 3380,690 C10.2 3446.85,656.85 3417.64,627.64 GAL16V8D-15QP.20 ; SN74ALS573.20 3696.22,1790.08 C8.1 ; C11.1 3770,2919.45 ADC0844CNN.14 ADC0844CNN.2 3770,2090 3696.22,2016.22 C8.1@3696.22,1923.78 ; v1(4100,2000) 3995,1895 C8.1 ; v1(4420,2010) 4420,1891.22 4420.08,1891.14 4420.08,1790 CY7C185.28 4358.07,1790 4343.07,1775 4343.07,1705 4358.07,1690 CY7C185.26 CY7C185.26@4420.08,1690 ; 1504.09,2015.91 1580,1940 ; C7.1@2570,1623.15 C7.1 2943.15,1990 3630,1990 C8.1@3696.22,1923.78 ; C7.1@2570,1623.15 2570,1520 2614.65,1475.35 ATMEGA162.38 2614.65,1134.65 2583.15,1103.15 2583.15,1100.35 ; C8.1 C8.1@3696.22,1923.78
  Bottom Layer w20: v1(740,1000) 710,1030 710,1560 830,1680 v1(950,1680) ; v1(1710,500) 1710,340 1830,220 2830,220 JTAG.4 ; v1(2160,920) v1(2160,1100) ; v1(3045,465) 3055,465 3300,710 v1(3360,710) ; v1(4100,2000) 4110,2010 v1(4420,2010)
VSS: C1.2 MC7805.1 POWER.1 | length 670
  Top Layer w50: POWER.1 443.15,256.85 C1.2 786.85,256.85 831.89,301.89 MC7805.1
pads on no net: ADC0844CNN.1 ADC0844CNN.8 ADC0844CNN.9 ADC0844CNN.10 ADC0844CNN.11 ADC0844CNN.12 ADC0844CNN.15 ADC0844CNN.22 ATMEGA162.10 ATMEGA162.11 ATMEGA162.26 ATMEGA162.29 ATMEGA162.43 CY7C185.1 GAL16V8D-15QP.5 GAL16V8D-15QP.6 GAL16V8D-15QP.7 GAL16V8D-15QP.8 GAL16V8D-15QP.9 GAL16V8D-15QP.11 GAL16V8D-15QP.12 GAL16V8D-15QP.13 GAL16V8D-15QP.14 GAL16V8D-15QP.15 J4.1 J4.4 J4.5 J4.6 J4.8 J4.9 J4.10 J4.11 J4.12 J4.13 J4.14 J4.15 J4.16 J4.17 J4.18 J4.19 J4.20 J4.21 J4.22 J4.23 J4.24 J4.25 JTAG.6 JTAG.7 JTAG.8 MAX233.1 MAX233.8 MAX233.13 MAX233.14 MAX233.18 MAX233.19 MAX233.20 MCP2515.3 MCP2515.4 MCP2515.5 MCP2515.6 MCP2515.10 MCP2515.11 MCP2551.5

## Text inside footprints (layer, text, board x,y; h text height)
J4: Top Overlay "25" at 1714.29,2982.24 h59.06; Top Overlay "14" at 523.5,2982.24 h59.06; Top Overlay "13" at 1773.56,2608.23 h59.06; Top Overlay "1" at 503.6,2608.23 h59.06
JTAG: Top Overlay "2" at 3080,190 h50 r180; Top Overlay "1" at 3060,290 h50 r180; Top Overlay "9" at 2520,290 h50 r180; Top Overlay "10" at 2520,190 h50 r180